# Altium PCB SL.PcbDoc (part 2 of 2)
Units mm, origin at the board's own origin, x right, y up, seen from the top; angles counter-clockwise.
Board outline 70 x 42.24 mm, 2 copper layers (Top Layer, Bottom Layer); 144 components, 106 nets, 459 pads, 155 vias.
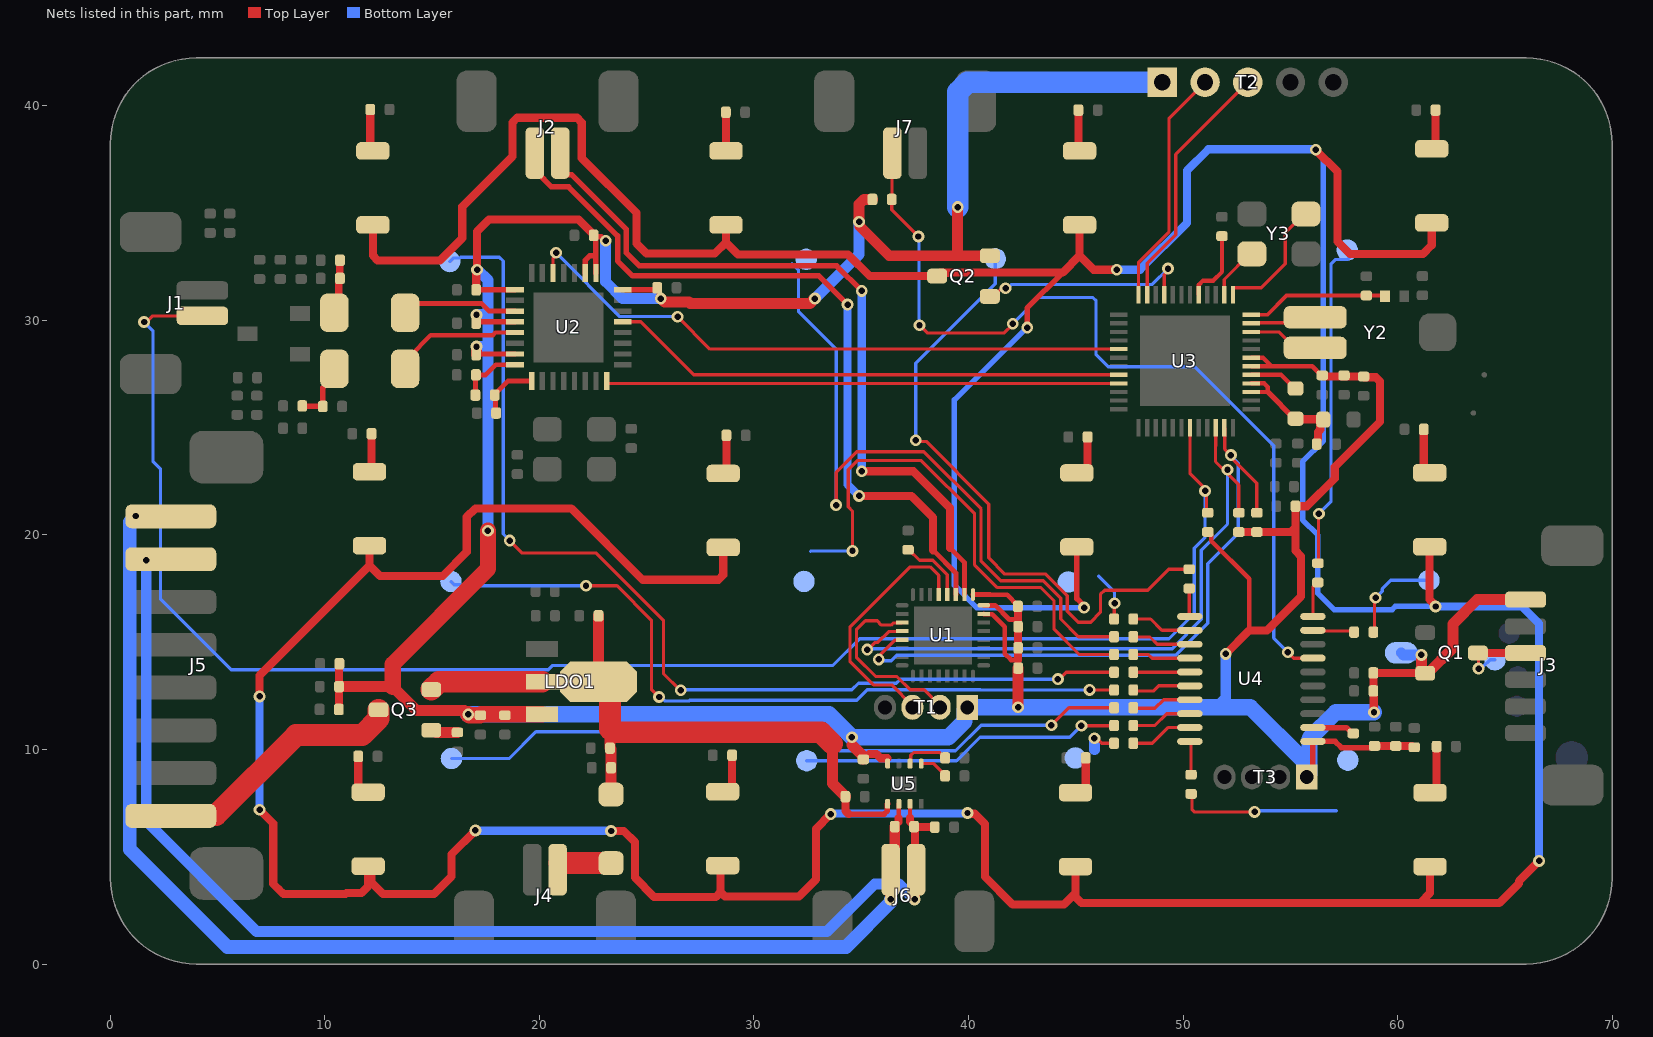
[diagram p2: the nets of this part, all layers, seen from the top]

## Via types
v1: diameter 0.55, hole 0.3, Top Layer to Bottom Layer, tented both sides, 155 vias

## Nets (pads, with @x,y where several pads share a name; then routed paths per layer and width w, separated by ;. In a path a pad name is that pad's centre, name@x,y a point inside that pad or via, vN(x,y) a via of type N, cw(c..) or ccw(c..) an arc to the next point about the centre after c; other vN are vias at no path point) (continued)
NetC14_2: C14.2 C15.2 L1.2 U3.3 U3.4 | length 6.3
  Top Layer w0.203: U3.3@53.18,26.663 53.953,26.663 53.953,26.896 53.786,27.063 U3.4@53.18,27.063 ; L1.2@55.202,25.415 L1.2@55.244,25.415
  Top Layer w0.254: 53.953,26.663 L1.2@55.202,25.415
  Top Layer w0.381: L1.2@55.244,25.415 55.262,25.397 56.519,25.397 C15.2@56.538,25.378 56.399,25.24 56.399,24.91 56.284,24.794 56.284,24.446 56.27,24.433 C14.2@56.27,24.158
NetC19_1: C19.1 R6.1 U2.16 | length 3
  Top Layer w0.229: R6.1@17.015,26.521 17.028,26.534 17.028,27.449 C19.1@17.041,27.461 17.498,27.461 17.972,27.935 U2.16@18.854,27.935
NetC21_1: C21.1 C24.1 L2.1 | length 2.9
  Top Layer w0.254: C21.1@8.948,26.013 8.96,26.001 9.89,26.001 C24.1@9.903,25.988 9.903,26.864 10.437,27.398 L2.1@10.437,27.741
NetC27_1: C27.1 C28.1 L3.1 | length 2.6
  Top Layer w0.356: L3.1@10.437,30.357 10.65,30.57 10.65,31.907 C28.1@10.7,31.957 C27.1@10.7,32.805
NetC32_2: C32.2 L4.1 U3.12 | length 6.6
  Top Layer w0.178: U3.12@53.18,30.263 53.93,30.263 54.826,31.16 59.367,31.16 L4.1@59.408,31.119
NetC33_2: C33.2 U3.17 | length 3.5
  Top Layer w0.203: U3.17@50.726,31.189 50.728,31.191 50.728,31.654 50.93,31.856 51.408,31.856 51.813,32.262 C33.2@51.813,33.929
NetC38_1: C38.1 C40.1 D1.2 ESD3.1 LDO1.2 Q3.2 R14.2 U5.1 | length 30.4
  Top Layer w0.254: 34.414,6.989 36.069,6.989 36.217,7.138 36.217,7.453 U5.1@36.231,7.466
  Top Layer w0.381: C38.1@34.262,7.802 34.262,7.141 34.414,6.989
  Top Layer w0.508: R14.2@22.754,16.234 22.754,13.167 LDO1.2@22.76,13.161 ; 23.289,10.951 C40.1@23.289,10.062 23.301,10.062 23.34,10.024 ESD3.1@23.34,9.148 D1.2@23.34,7.903 ; 33.652,10.265 33.652,8.411 C38.1@34.262,7.802
  Top Layer w1.016: Q3.2@14.958,12.795 15.324,13.161 LDO1.2@20.122,13.161 ; LDO1.2@22.76,13.161 22.847,13.161 23.289,12.719 23.289,10.951 23.441,10.799 33.119,10.799 33.652,10.265
NetC41_2: C41.2 U4.2 | length 2
  Top Layer w0.254: U4.2@56.054,11.023 57.62,11.023 57.895,10.748 C41.2@57.935,10.748
NetC42_1: C42.1 ESD4.1 J5.7 J6.1 U5.3 | length 56.8
  Top Layer w0.203: 37.275,6.82 U5.3@37.275,7.466
  Top Layer w0.381: 37.275,6.82 37.275,6.631 37.424,6.482 37.424,6.455 37.5,6.379 ESD4.1@38.427,6.379 ; C42.1@37.5,6.367 37.5,4.456 J6.1@37.557,4.398
  Top Layer w0.508: v1(37.488,3.009) 37.496,3.017 37.496,4.336 J6.1@37.557,4.398
  Bottom Layer w0.508: v1(1.674,18.825) 1.674,6.659 6.817,1.515 33.411,1.515 35.629,3.733 36.752,3.733 37.476,3.009 v1(37.488,3.009)
NetC42_2: C42.2 J5.8 J6.2 U5.2 | length 58.3
  Top Layer w0.203: 36.742,6.811 36.753,6.822 U5.2@36.753,7.466
  Top Layer w0.381: C42.2@36.742,6.622 36.742,6.811
  Top Layer w0.508: v1(36.37,3.009) 36.37,5.171 36.563,5.364 C42.2@36.563,6.405
  Bottom Layer w0.635: v1(1.191,20.883) 0.912,20.603 0.912,5.338 5.458,0.791 34.287,0.791 36.37,2.874 v1(36.37,3.009)
NetD1_1: D1.1 J4.1 | length 2.4
  Top Layer w1.016: J4.1@20.93,4.702 D1.1@23.34,4.702
NetJ1_1: J1.1 R1.1 U3.43 | length 76.9
  Top Layer w0.152: v1(1.572,29.925) 1.68,29.925 1.965,30.211 J1.1@4.29,30.211 ; U3.43@50.326,24.992 50.326,22.858 v1@51.08,22.105 ; v1(51.026,22.051) v1@51.089,22.051 ; R1.1@51.153,21.035 51.089,21.098 51.089,21.988 v1@51.153,22.051
  Bottom Layer w0.152: v1(1.572,29.925) 1.983,29.514 1.983,23.441 2.334,23.09 2.334,17.017 5.631,13.72 20.412,13.72 20.611,13.919 33.683,13.919 34.929,15.164 49.344,15.164 50.518,16.338 50.518,19.383 51.026,19.891 v1(51.026,22.051)
NetJ2_1: J2.1 U1.11 | length 35.7
  Top Layer w0.229: 38.351,19.285 39.408,18.228 U1.11@39.408,17.22
  Top Layer w0.254: J2.1@19.784,37.799 19.784,37.013 20.199,36.598 20.199,36.581 20.556,36.224 21.359,36.224 23.645,33.938 23.645,32.77 24.342,32.072 33.029,32.072 v1(34.363,30.738)
  Top Layer w0.381: v1(34.897,21.822) 37.335,21.822 38.351,20.806 38.351,19.285
  Bottom Layer w0.381: v1(34.363,30.738) 34.363,22.356 v1(34.897,21.822)
NetJ2_2: J2.2 U1.10 | length 35.3
  Top Layer w0.229: 39.138,19.389 39.215,19.312 39.808,18.719 U1.10@39.808,17.22
  Top Layer w0.254: J2.2@20.971,37.799 20.971,37.039 21.217,36.793 21.501,36.793 24.051,34.243 24.051,33.151 24.661,32.541 33.855,32.541 v1(35.024,31.373)
  Top Layer w0.381: v1(35.024,22.965) 37.437,22.965 39.138,21.265 39.138,19.389
  Bottom Layer w0.381: v1(35.024,22.965) v1(35.024,31.373)
NetJ3_3: J3.3 pad.1@64.539,14.177 Q1.3 | length 3.9
  Top Layer w0.152: Q1.3@63.743,14.498 63.777,14.464 v1(63.777,13.771)
  Top Layer w0.356: Q1.3@63.743,14.498 65.961,14.498 J3.3@65.963,14.496
  Bottom Layer w0.152: v1(63.777,13.771) 63.853,13.847 63.979,13.847 64.309,14.177 pad.1@64.539,14.177
NetJ5_1: J5.1 Q3.3 | length 12
  Top Layer w1.016: J5.1@2.819,6.902 2.866,6.949 4.936,6.949 8.659,10.672 11.731,10.672 12.504,11.445 Q3.3@12.504,11.848
NetL1_1: L1.1 U3.5 | length 2.3
  Top Layer w0.203: U3.5@53.18,27.463 54.564,27.463 55.202,26.826 L1.1@55.244,26.826
NetL2_2: L2.2 U2.13 | length 6
  Top Layer w0.203: L2.2@13.736,27.741 13.736,28.097 14.433,28.794 14.433,28.816 14.928,29.311 17.824,29.311 17.948,29.435 U2.13@18.854,29.435
NetL3_2: L3.2 U2.11 | length 5.4
  Top Layer w0.229: L3.2@13.736,30.357 14.176,30.797 17.29,30.797 17.652,30.435 U2.11@18.854,30.435
NetLED1_1: LED1.1 LED2.1 LED3.1 LED4.1 LED5.1 LED6.1 LED7.1 LED8.1 LED9.1 LED10.1 LED11.1 LED12.1 Q2.3 | length 262.4
  Top Layer w0.254: v1(42.738,29.666) 42.738,30.578 44.396,32.236 ; LED9.1@45.051,19.44 45.051,17.031 45.387,16.696 v1(45.387,16.615)
  Top Layer w0.381: v1(6.957,7.192) 7.592,6.557 7.592,3.738 7.846,3.483 8.065,3.264 10.965,3.264 11.007,3.306 11.707,3.306 12.014,3.613 LED10.1@12.014,4.561 12.172,4.404 12.172,3.806 12.713,3.264 15.088,3.264 15.904,4.08 15.904,5.116 v1(17.015,6.227) ; v1(6.957,12.475) 6.957,13.455 12.08,18.579 ; LED1.1@12.08,19.498 12.08,18.579 ; LED4.1@12.236,34.452 12.236,33.018 12.459,32.795 15.364,32.795 16.406,33.837 16.406,35.31 18.742,37.647 18.742,39.227 18.966,39.45 21.745,39.45 21.968,39.227 21.968,37.57 24.521,35.018 24.521,33.583 24.985,33.118 28.171,33.118 28.692,33.64 ; v1(23.34,6.201) 23.929,6.201 24.447,5.683 24.447,4.027 25.346,3.128 28.222,3.128 28.445,3.351 ; LED11.1@28.542,4.586 28.445,4.489 28.445,3.351 ; LED6.1@28.566,19.418 28.566,18.134 28.342,17.911 24.813,17.911 21.486,21.238 17.015,21.238 16.609,20.832 16.609,19.206 15.491,18.089 12.57,18.089 12.08,18.579 ; LED5.1@28.692,34.452 28.692,33.64 ; v1(33.576,6.989) 32.89,6.303 32.89,3.941 32.103,3.153 28.643,3.153 28.445,3.351 ; v1(39.951,7.04) 39.984,7.007 40.288,7.007 40.764,6.532 40.764,4.067 42.059,2.772 44.447,2.772 44.985,3.31 ; LED12.1@44.985,4.541 44.985,3.31 ; LED3.1@45.178,34.452 45.178,33.018 ; v1(46.911,32.363) 45.833,32.363 45.178,33.018 ; v1(56.182,37.951) 57.198,36.935 57.198,33.676 57.774,33.1 61.186,33.1 61.589,33.504 LED2.1@61.589,34.547 ; LED8.1@61.494,19.453 61.494,16.987 61.77,16.712 v1(61.77,16.666) ; LED7.1@61.513,4.542 61.513,3.303 61.059,2.849 ; v1(66.596,4.804) 65.653,3.861 65.653,3.76 64.742,2.849 61.059,2.849 ; 28.692,33.64 29.258,33.075 34.389,33.075 35.397,32.066 Q2.3@38.539,32.066 38.693,32.22 39.02,32.22 39.036,32.236 44.396,32.236 45.178,33.018 ; 44.985,3.31 44.985,3.123 45.26,2.849 61.059,2.849
  Bottom Layer w0.254: v1(42.738,29.666) 42.715,29.666 39.342,26.293 39.342,17.657 40.383,16.615 v1(45.387,16.615) ; v1(56.182,37.951) 56.182,37.879 56.538,37.523 56.538,24.388 55.572,23.423 55.572,20.705 56.284,19.994 56.284,17.276 57.046,16.514 59.741,16.514 59.894,16.666 v1(61.77,16.666)
  Bottom Layer w0.381: v1(6.957,7.192) v1(6.957,12.475) ; v1(17.015,6.227) 17.028,6.214 23.327,6.214 v1(23.34,6.201) ; v1(33.576,6.989) 33.601,7.014 39.926,7.014 v1(39.951,7.04) ; v1(46.911,32.363) 48.003,32.363 50.188,34.548 50.188,36.986 51.178,37.977 v1@56.182,37.977 ; v1(61.77,16.666) 65.809,16.666 66.596,15.879 v1(66.596,4.804)
NetLED1_2: LED1.2 R12.1 | length 1.8
  Top Layer w0.381: LED1.2@12.08,22.946 12.173,23.039 R12.1@12.173,24.718
NetLED2_2: LED2.2 R9.1 | length 1.9
  Top Layer w0.381: LED2.2@61.589,37.996 61.77,38.176 R9.1@61.77,39.806
NetLED3_2: LED3.2 R11.1 | length 1.9
  Top Layer w0.381: R11.1@45.123,39.806 45.123,37.955 LED3.2@45.178,37.901
NetLED4_2: LED4.2 R13.1 | length 2
  Top Layer w0.381: R13.1@12.113,39.831 12.113,38.023 LED4.2@12.236,37.901
NetLED5_2: LED5.2 R20.1 | length 1.8
  Top Layer w0.254: LED5.2@28.689,37.904 LED5.2@28.692,37.901
  Top Layer w0.381: LED5.2@28.689,37.904 R20.1@28.689,39.704
NetLED6_2: LED6.2 R24.1 | length 1.8
  Top Layer w0.381: LED6.2@28.566,22.866 28.715,23.015 R24.1@28.715,24.642
NetLED7_2: LED7.2 R28.1 | length 2.3
  Top Layer w0.381: LED7.2@61.513,7.991 61.605,7.991 61.821,8.207 R28.1@61.821,10.138
NetLED8_2: LED8.2 R32.1 | length 2.1
  Top Layer w0.381: R32.1@61.221,24.921 61.221,23.175 LED8.2@61.494,22.901
NetLED9_2: LED9.2 R36.1 | length 2
  Top Layer w0.381: LED9.2@45.051,22.888 45.333,22.888 45.549,23.104 R36.1@45.549,24.566
NetLED10_2: LED10.2 R41.1 | length 2
  Top Layer w0.381: R41.1@11.554,9.681 11.554,8.225 11.77,8.01 LED10.2@12.014,8.01
NetLED11_2: LED11.2 R42.1 | length 2
  Top Layer w0.254: LED11.2@28.542,8.034 28.704,8.034 LED11.2@28.979,8.308
  Top Layer w0.381: LED11.2@28.979,8.308 R42.1@28.979,9.732
NetLED12_2: LED12.2 R44.1 | length 1.9
  Top Layer w0.254: LED12.2@44.985,7.99 45.189,7.99 LED12.2@45.463,8.264
  Top Layer w0.381: LED12.2@45.463,8.264 R44.1@45.463,9.605
NetQ3_1: Q3.1 R17.2 | length 1.3
  Top Layer w0.508: Q3.1@14.958,10.9 15.078,10.9 15.18,10.799 R17.2@16.177,10.799
NetR3_1: R3.1 R6.2 U2.17 | length 2.9
  Top Layer w0.229: R3.1@17.98,25.683 17.947,25.716 17.947,26.488 R6.2@17.914,26.521 17.914,26.561 18.525,27.172 U2.17@19.634,27.172
NetR5_2: R5.2 U1.12 | length 3.2
  Top Layer w0.152: R5.2@37.183,19.308 37.222,19.308 37.715,18.815 38.336,18.815 39.008,18.143 U1.12@39.008,17.22
NetR18_1: R18.1 TP1.1 | length 7.6
  Top Layer w0.152: R18.1@50.373,7.928 50.42,7.881 50.42,7.188 50.518,7.09 v1(53.337,7.09)
  Bottom Layer w0.152: v1(53.337,7.09) 53.388,7.141 57.156,7.141
NetR18_2: R18.2 U4.20 | length 1.6
  Top Layer w0.152: U4.20@50.316,10.376 50.373,10.319 R18.2@50.373,8.827
NetR21_1: R21.1 TP2.1 | length 1.5
  Top Layer w0.152: v1(45.87,10.519) 45.977,10.519 46.206,10.291 R21.1@46.784,10.291
  Bottom Layer w0.508: 45.87,9.986 v1(45.87,10.519)
NetR21_2: R21.2 U4.19 | length 2.9
  Top Layer w0.152: R21.2@47.683,10.291 48.562,10.291 49.294,11.023 U4.19@50.316,11.023
NetR23_1: R23.1 TP3.1 | length 15
  Top Layer w0.152: v1(45.26,11.104) 45.267,11.111 46.777,11.111 R23.1@46.784,11.118
  Bottom Layer w0.152: TP3.1@32.458,9.478 39.443,9.478 40.536,10.57 44.727,10.57 v1(45.26,11.104)
NetR23_2: R23.2 U4.18 | length 2.9
  Top Layer w0.152: R23.2@47.683,11.118 48.678,11.118 49.23,11.67 U4.18@50.316,11.67
NetR26_1: R26.1 TP4.1 | length 32.6
  Top Layer w0.152: v1(43.863,11.129) 44.679,11.945 R26.1@46.784,11.945
  Bottom Layer w0.152: TP4.1@15.898,9.58 18.59,9.58 19.835,10.824 33.093,10.824 33.982,9.935 39.393,9.935 40.586,11.129 v1(43.863,11.129)
NetR26_2: R26.2 U4.17 | length 2.8
  Top Layer w0.152: R26.2@47.683,11.945 47.712,11.916 48.689,11.916 49.09,12.317 U4.17@50.316,12.317
NetR27_1: R27.1 TP5.1 | length 35.3
  Top Layer w0.152: v1(22.171,17.631) 23.619,17.631 25.219,16.031 25.219,12.802 v1@25.575,12.446 ; v1(45.641,12.776) 45.642,12.774 46.783,12.774 R27.1@46.784,12.773
  Bottom Layer w0.152: TP5.1@15.872,17.835 16.034,17.672 16.344,17.672 16.385,17.631 v1(22.171,17.631) ; v1(25.575,12.445) 25.673,12.445 25.863,12.255 26.955,12.255 26.997,12.297 34.795,12.297 35.277,12.78 40.543,12.78 40.547,12.776 v1(45.641,12.776)
NetR27_2: R27.2 U4.16 | length 2.7
  Top Layer w0.152: R27.2@47.683,12.773 47.726,12.729 48.638,12.729 48.873,12.964 U4.16@50.316,12.964
NetR30_1: R30.1 TP6.1 | length 48.7
  Top Layer w0.152: v1(18.615,19.74) 19.2,19.155 22.654,19.155 25.778,16.031 25.778,13.542 26.561,12.759 v1(26.591,12.759) ; v1(44.168,13.279) 44.238,13.279 44.559,13.6 R30.1@46.784,13.6
  Bottom Layer w0.152: TP6.1@15.821,32.744 15.984,32.907 16.293,32.907 16.334,32.948 18.133,32.948 18.311,32.77 18.311,20.044 v1(18.615,19.74) ; v1(26.591,12.759) 26.612,12.78 34.567,12.78 34.871,13.085 36.642,13.085 36.836,13.279 v1(44.168,13.279)
NetR30_2: R30.2 U4.15 | length 2.6
  Top Layer w0.152: R30.2@47.683,13.6 47.688,13.606 50.31,13.606 U4.15@50.316,13.612
NetR31_1: R31.1 TP7.1 | length 24.3
  Top Layer w0.152: v1(34.592,19.257) 34.592,21.106 34.393,21.305 34.393,23.047 34.815,23.469 37.805,23.469 40.282,20.993 40.282,18.597 41.323,17.555 43.356,17.555 43.99,16.921 43.99,15.599 45.162,14.427 R31.1@46.784,14.427
  Bottom Layer w0.152: 32.636,19.232 32.662,19.257 v1(34.592,19.257)
NetR31_2: R31.2 U4.14 | length 2.7
  Top Layer w0.152: R31.2@47.683,14.427 48.388,14.427 48.557,14.259 U4.14@50.316,14.259
NetR33_1: R33.1 TP9.1 | length 32.5
  Top Layer w0.152: v1(33.83,21.391) 33.83,22.915 34.795,23.88 37.92,23.88 40.586,21.214 40.586,18.774 41.501,17.86 43.482,17.86 44.295,17.047 44.295,16.082 45.122,15.255 R33.1@46.784,15.255
  Bottom Layer w0.152: 31.773,32.643 32.077,32.338 32.077,30.408 33.83,28.655 v1(33.83,21.391)
NetR33_2: R33.2 U4.13 | length 2.8
  Top Layer w0.152: R33.2@47.683,15.255 47.694,15.244 48.46,15.244 48.798,14.906 U4.13@50.316,14.906
NetR34_1: R34.1 TP8.1 | length 4.5
  Top Layer w0.152: R34.1@58.87,15.472 58.923,15.525 58.923,17.015 v1(58.976,17.068)
  Bottom Layer w0.152: v1(58.976,17.068) 58.976,17.072 59.282,17.377 59.282,17.485 59.682,17.885 TP8.1@61.465,17.885
NetR34_2: R34.2 U4.9 | length 2
  Top Layer w0.152: U4.9@56.054,15.553 56.085,15.521 57.923,15.521 R34.2@57.972,15.472
NetR35_1: R35.1 TP11.1 | length 2.3
  Top Layer w0.152: R35.1@46.784,16.082 46.797,16.095 46.797,16.806 v1(46.809,16.819)
  Bottom Layer w0.152: 46.065,18.071 46.809,17.327 v1(46.809,16.819)
NetR35_2: R35.2 U4.12 | length 2.9
  Top Layer w0.152: R35.2@47.683,16.082 48.486,16.082 49.015,15.553 U4.12@50.316,15.553
NetR37_2: R37.2 U5.6 | length 2.2
  Top Layer w0.152: U5.6@37.275,9.342 37.312,9.379 37.312,9.734 37.437,9.859 38.656,9.859 38.742,9.773 38.761,9.773 38.91,9.624 R37.2@38.91,9.605
NetR38_1: R38.1 TP10.1 | length 15.2
  Top Layer w0.152: R38.1@56.284,18.683 56.309,18.708 56.309,20.959 v1(56.334,20.984)
  Bottom Layer w0.152: v1(56.334,20.984) 56.893,21.543 56.893,32.617 57.117,32.842 57.676,32.842 TP10.1@57.757,32.922
NetR38_2: R38.2 U4.10 | length 1.7
  Top Layer w0.152: U4.10@56.054,16.2 56.054,17.573 56.265,17.784 R38.2@56.284,17.784
NetR39_1: R39.1 TP12.1 | length 29.7
  Top Layer w0.152: v1(37.541,24.411) 37.592,24.36 38.024,24.36 40.942,21.441 40.942,18.927 41.691,18.178 43.595,18.178 44.345,17.428 44.6,17.173 44.6,16.438 45.108,15.93 45.692,15.93 46.149,16.387 46.149,17.225 46.352,17.428 48.359,17.428 49.334,18.403 R39.1@50.289,18.403
  Bottom Layer w0.152: v1(37.541,24.411) 37.541,27.997 41.247,31.703 TP12.1@41.247,32.871
NetR39_2: R39.2 U4.11 | length 1.3
  Top Layer w0.152: R39.2@50.289,17.504 50.289,16.227 U4.11@50.316,16.2
NetR40_2: R40.2 U5.5 | length 1.4
  Top Layer w0.152: U5.5@37.797,9.342 38.374,9.342 38.91,8.806 R40.2@38.91,8.767
NetU3_10: U3.10 Y2.2 | length 3.3
  Top Layer w0.152: U3.10@53.18,29.463 54.47,29.463 55.214,28.719 Y2.2@56.161,28.719
NetU3_11: U3.11 Y2.1 | length 3.1
  Top Layer w0.152: U3.11@53.18,29.863 53.204,29.887 55.901,29.887 Y2.1@56.161,30.147
NetU3_13: U3.13 Y3.4 | length 6
  Top Layer w0.152: U3.13@52.326,31.189 52.326,31.494 52.35,31.517 52.431,31.517 52.439,31.525 53.642,31.525 54.76,32.643 54.76,34.082 55.637,34.959 Y3.4@55.731,34.959
NetU3_14: U3.14 Y3.2 | length 2.5
  Top Layer w0.152: U3.14@51.926,31.189 51.926,31.908 53.118,33.1 Y3.2@53.21,33.1
NPD: U2.6 U3.29 | length 29.1
  Top Layer w0.152: U2.6@20.634,32.206 20.634,32.903 20.774,33.043 v1(20.774,33.151) ; v1(26.439,30.17) 27.945,28.663 U3.29@47,28.663
  Bottom Layer w0.152: v1(20.774,33.151) 23.746,30.179 26.429,30.179 v1(26.439,30.17)
NSS: U2.24 U3.33 | length 23.9
  Top Layer w0.152: U2.24@23.134,27.172 23.134,27.112 23.183,27.063 U3.33@47,27.063
P1.4: J7.1 R43.1 U4.7 | length 41.5
  Top Layer w0.152: J7.1@36.453,37.799 36.437,37.783 36.437,35.656 R43.1@36.421,35.64 36.421,35.157 v1(37.665,33.913) ; v1(37.716,29.773) 38.073,29.417 41.671,29.417 42.06,29.805 v1(42.06,29.849) ; v1(54.887,14.533) 55.161,14.259 U4.7@56.054,14.259
  Bottom Layer w0.152: v1(37.665,33.913) 37.691,33.887 37.691,29.798 v1(37.716,29.773) ; v1(42.06,29.849) 43.279,31.068 45.793,31.068 45.946,30.916 45.946,28.401 46.505,27.842 50.543,27.842 54.226,24.159 54.226,15.193 v1(54.887,14.533)
SCK: U2.29 U3.32 | length 24.1
  Top Layer w0.152: U2.29@23.884,29.935 24.726,29.935 27.198,27.463 U3.32@47,27.463
"SCL GPIO31": R46.1 U1.21 U3.47 | length 30.8
  Top Layer w0.152: v1(35.813,14.198) 35.889,14.274 35.889,14.424 36.561,15.096 36.885,15.096 U1.21@36.908,15.12 ; U3.47@51.926,24.992 51.95,24.969 51.95,24.003 52.245,23.708 52.245,23.6 53.439,22.407 R46.1@53.439,21.035
  Bottom Layer w0.152: v1(35.813,14.198) 35.873,14.137 36.401,14.137 36.656,14.392 49.666,14.392 51.157,15.883 51.157,18.657 52.576,20.076 52.576,23.35 52.233,23.693 v1(52.233,23.72)
"SDA GPIO30": R45.1 U1.20 U3.46 | length 30.2
  Top Layer w0.152: v1(35.28,14.654) 35.323,14.654 35.657,14.989 35.765,14.989 36.273,15.496 36.885,15.496 U1.20@36.908,15.52 ; U3.46@51.526,24.992 51.526,24.149 51.513,24.136 51.513,23.42 v1@51.984,22.948 ; v1(52.072,23.036) v1@51.984,22.948 ; R45.1@52.601,21.035 52.601,22.332 v1@51.984,22.948
  Bottom Layer w0.152: v1(35.28,14.654) 35.326,14.701 49.493,14.701 50.852,16.061 50.852,19.287 52.072,20.506 v1(52.072,23.036)
SWDIO: Q2.1 U3.21 | length 10.1
  Top Layer w0.152: Q2.1@40.993,31.119 41.165,31.119 41.47,31.424 41.653,31.424 v1(41.729,31.5) ; U3.21@49.126,31.189 49.126,32.134 49.299,32.307 v1(49.299,32.414)
  Bottom Layer w0.152: v1(41.729,31.5) 41.837,31.5 42.015,31.678 48.562,31.678 v1(49.299,32.414)
"UART RX": T2.2 U3.24 | length 11.2
  Top Layer w0.152: U3.24@47.926,31.189 47.926,32.718 49.349,34.141 49.349,39.425 T2.2@51.026,41.101
"UART TX": T2.3 U3.23 | length 11.9
  Top Layer w0.152: U3.23@48.326,31.189 48.326,32.661 49.654,33.989 49.654,37.737 T2.3@53.018,41.101
VBAT: C1.1 C2.1 C4.2 C7.1 C8.1 C16.1 C17.1 C18.1 C20.1 C22.2 C23.2 C34.2 C35.2 C36.1 C37.1 C43.1 ESD1.2 ESD2.2 J3.1 LDO1.3 pad.1@60.17,14.507 Q1.2 Q2.2 R1.2 R2.1 R15.1 R19.1 R22.1 R25.1 R29.1 R43.2 R45.2 R46.2 T1.1 T2.1 T3.1 U1.7 U1.8 U1.9 U2.2 U2.3 U2.9 U2.12 U2.15 U2.32 U3.6 U3.7 U4.1 U5.8 | length 211.8
  Top Layer w0.203: U5.8@36.231,9.342 36.231,9.592 ; R1.2@51.153,20.136 51.186,20.136 51.311,20.011 51.311,19.724 53.082,17.953 53.082,15.547 ; U3.6@53.18,27.863 54.125,27.863 ; U3.7@53.18,28.263 53.181,28.262 53.726,28.262 54.125,27.863 ; C23.2@56.487,27.436 56.447,27.436 56.02,27.863 54.125,27.863
  Top Layer w0.229: U1.9@40.209,17.22 41.006,17.22 41.014,17.212 41.797,17.212 42.304,16.706 C4.2@42.304,16.666 ; U1.7@40.708,16.32 40.723,16.306 41.1,16.306 41.691,15.714 41.691,14.469 41.983,14.177 42.309,14.177 ; U1.8@40.709,16.72 41.243,16.72 41.907,16.057 42.309,16.057
  Top Layer w0.254: C17.1@17.05,31.424 17.06,31.433 18.852,31.433 U2.9@18.854,31.435 ; v1@17.05,32.322 v1(17.091,32.363) ; C18.1@17.109,29.933 18.852,29.933 U2.12@18.854,29.935 ; C16.1@17.198,28.435 U2.15@18.854,28.435 ; U2.3@22.134,32.206 22.136,32.208 22.136,32.811 22.337,33.012 22.634,33.012 ; C2.1@22.426,34.104 22.527,34.003 C2.1@22.527,33.964 22.595,33.896 22.882,33.896 23.066,33.711 v1(23.087,33.711) ; U2.2@22.634,32.206 22.634,33.012 ; C2.1@22.634,33.817 22.634,33.012 ; U2.32@23.884,31.435 23.886,31.437 C1.1@25.489,31.437 ; C1.1@25.489,31.525 25.59,31.424 25.59,31.078 v1(25.651,31.017) ; T3.1@55.765,8.716 56.054,9.005 U4.1@56.054,10.376 57.087,10.376 57.376,10.088 58.849,10.088 C37.1@58.925,10.164
  Top Layer w0.381: R15.1@10.649,11.866 10.662,11.878 10.662,13.984 R22.1@10.675,13.997 ; C17.1@17.05,31.424 v1@17.05,32.322 ; v1(17.091,32.363) 17.091,34.141 17.65,34.7 21.83,34.7 C2.1@22.426,34.104 ; 35.369,9.783 35.711,9.783 35.901,9.592 36.231,9.592 ; C4.2@42.304,16.666 42.309,16.661 42.309,16.057 42.309,14.177 ; v1(51.991,14.456) 53.082,15.547 53.92,15.547 55.504,17.132 55.504,19.005 55.242,19.267 55.242,20.359 ; R45.2@52.601,20.136 R46.2@53.439,20.136 55.019,20.136 55.242,20.359 ; C23.2@56.487,27.436 56.526,27.436 56.577,27.385 ESD1.2@58.417,27.385 58.455,27.347 58.994,27.347 59.179,27.162 59.179,25.277 57.071,23.169 57.071,22.635 55.776,21.34 R2.1@55.242,21.34 55.242,20.359 ; v1(58.9,11.739) 58.885,11.753 58.885,12.714 R25.1@58.87,12.729 R29.1@58.87,13.567 58.878,13.56 Q1.2@61.2,13.56 ; C37.1@58.925,10.164 C36.1@59.916,10.164 60.679,10.164 60.74,10.103 ESD2.2@60.779,10.103 ; Q1.2@61.28,13.56 Q1.2@61.287,13.553
  Top Layer w0.508: R19.1@10.685,12.931 13.155,12.931 14.272,11.815 16.496,11.815 16.674,11.637 v1(16.685,11.637) ; C16.1@17.058,28.409 17.058,28.774 v1(17.066,28.782) ; v1(25.651,31.017) 25.663,31.017 25.829,30.851 26.97,30.851 27.028,30.793 32.604,30.793 32.828,31.017 v1(32.839,31.017) ; 34.575,10.209 35.086,9.698 C43.1@35.086,9.564 ; R43.2@35.522,35.64 35.12,35.64 34.897,35.417 v1(34.897,34.599) 34.929,34.566 34.929,34.389 36.304,33.013 39.494,33.013 ; v1(39.494,35.284) 39.494,33.013 ; Q2.2@40.993,33.013 39.494,33.013 ; v1(42.314,11.967) C20.1@42.314,13.796 ; v1(61.11,14.406) 61.118,14.398 61.118,13.643 61.2,13.56 Q1.2@61.28,13.56 ; Q1.2@61.287,13.553 61.408,13.553 62.583,14.728 62.583,15.853 63.714,16.985 J3.1@65.963,16.985
  Top Layer w0.762: 13.155,12.931 13.155,13.975 17.599,18.419 v1(17.599,20.197) ; v1(16.685,11.637) 16.724,11.598 C35.2@17.249,11.598 17.293,11.642 LDO1.3@20.122,11.642
  Bottom Layer w0.508: v1(17.066,28.782) 17.074,28.79 17.557,28.79 17.599,28.833 ; v1(17.066,30.255) 17.098,30.288 17.581,30.288 17.599,30.306 ; v1@17.142,32.338 17.599,31.881 17.599,30.306 ; v1(17.599,20.197) 17.599,28.833 ; v1(23.087,33.711) 23.087,31.803 23.873,31.017 v1(25.651,31.017) ; v1(32.839,31.017) 34.897,33.075 v1(34.897,34.599) ; 51.559,11.967 51.991,12.399 v1(51.991,14.456) ; pad.1@60.17,14.507 60.267,14.41 61.105,14.41 v1(61.11,14.406) ; 17.599,28.833 17.599,30.306
  Bottom Layer w0.762: v1(16.685,11.637) 33.5,11.637 v1(34.567,10.57) 39.062,10.57 39.814,11.322 39.814,11.841 T1.1@39.941,11.967 51.559,11.967 53.134,11.967 55.638,9.463 ; T3.1@55.891,8.843 55.891,10.508 57.122,11.739 v1(58.9,11.739)
  Bottom Layer w1.016: v1(39.494,35.284) 39.494,40.644 39.951,41.101 T2.1@49.034,41.101
WTV380P_RX: T1.2 U1.19 | length 8.6
  Top Layer w0.152: U1.19@36.908,15.92 36.885,15.896 36.484,15.896 36.389,15.801 36.191,15.801 35.941,15.801 35.74,16.001 35.197,16.001 34.776,15.58 34.776,14.298 35.671,13.402 36.662,13.402 37.284,12.78 37.927,12.78 38.663,12.043 T1.2@38.663,11.967
WTV380P_TX: T1.3 U1.13 | length 11.8
  Top Layer w0.152: T1.3@37.386,11.967 37.386,12.043 36.421,13.009 35.57,13.009 34.471,14.108 34.471,15.706 37.275,18.51 38.21,18.51 38.608,18.112 U1.13@38.608,17.22
pads on no net: A1.2 U1.1 U1.2 U1.3 U1.5 U1.6 U1.14 U1.15 U1.18 U1.22 U1.23 U1.24 U1.25 U1.26 U1.27 U1.28 U1.29 U1.30 U1.31 U1.32 U2.7 U2.8 U2.19 U2.20 U2.25 U2.26 U2.27 U2.28 U3.8 U3.9 U3.15 U3.16 U4.8

## Polygon pours and split planes (outlines as drawn)
NetR23_1 on Bottom Layer "NETR23_1_L02_P009" (solid, pour order 9): 24.098,2.265 33.098,2.265 33.098,10.265 24.098,10.265
NetR34_1 on Bottom Layer "NETR34_1_L02_P013" (solid, pour order 13): 57.223,17.175 66.016,17.175 66.016,21.894 62.735,25.175 57.223,25.175
GND on Bottom Layer "NONET_L01_P-001" (solid, remove dead copper, pour order 29): 66.571,25.556 70.304,25.556 70.304,0.893 68.45,-0.961 68.399,-0.911 50.111,-0.911 50.111,4.982 56.284,4.982 56.284,1.934 65.885,1.934 65.885,2.29 66.672,3.077
NetR35_1 on Bottom Layer "NETR35_1_L02_P007" (solid, pour order 7): 40.557,17.175 49.557,17.175 49.557,24.642 40.557,24.642
GND on Bottom Layer "NONET_L01_P-001" (solid, remove dead copper, pour order 27): 19.733,31.322 19.733,31.347 18.869,31.347 18.869,21.746 23.48,21.746 23.48,31.41
GND on Bottom Layer "NONET_L01_P-001" (solid, pour order 18): 47.546,30.331 47.597,30.382 50.873,30.382 52.118,31.627 52.093,31.652 52.093,36.554 52.118,36.529 56.131,36.529 56.131,33.405 56.131,32.846 55.776,31.881 55.776,26.979 55.852,26.902 56.131,26.902 56.131,25.353 54.506,25.353 51.331,28.528 51.331,28.63 47.724,28.63 47.597,28.757
GND on Bottom Layer "NONET_L01_P-001" (solid, pour order 15): 57.858,32.49 62.151,32.49 62.837,31.805 62.837,27.842 57.858,27.842
NetR39_1 on Bottom Layer "NONET_L01_P-001" (solid, pour order 20): 40.557,40.136 40.582,40.11 49.4,40.11 49.4,35.767 45.743,32.109 45.716,32.136 40.557,32.136
NetR18_1 on Bottom Layer "NETR18_1_L02_P005" (solid, pour order 5): 57.016,2.265 66.016,2.265 66.016,10.265 57.016,10.265
NetR38_1 on Bottom Layer "NETR38_1_L02_P012" (solid, pour order 12): 57.016,40.136 66.016,40.136 66.016,36.533 62.151,32.668 57.016,32.668
NetR27_1 on Bottom Layer "NETR27_1_L02_P011" (solid, pour order 11): 7.562,17.175 16.562,17.175 16.562,25.175 7.562,25.175
NetR26_1 on Bottom Layer "NETR26_1_L02_P010" (solid, pour order 10): 7.562,2.265 16.562,2.265 16.562,10.265 7.562,10.265
NetR31_1 on Bottom Layer "NETR31_1_L02_P008" (solid, pour order 8): 24.098,17.175 33.098,17.175 33.098,25.175 24.098,25.175
NetR21_1 on Bottom Layer "NETR21_1_L02_P006" (solid, pour order 6): 40.557,2.265 49.557,2.265 49.557,10.265 40.557,10.265
NetR33_1 on Bottom Layer "NETR33_1_L02_P001" (solid, pour order 1): 24.098,32.136 33.098,32.136 33.098,40.136 24.098,40.136
NetR30_1 on Bottom Layer "NETR30_1_L02_P000" (solid, pour order 0): 7.562,32.136 16.562,32.136 16.562,40.136 7.562,40.136
GND on Top Layer "NONET_L01_P-001" (solid, pour order 28): 20.851,14.355 20.825,14.329 19.403,14.329 19.403,15.752 19.606,15.955 19.606,17.708 20.012,17.708 20.089,17.631 20.089,15.752 20.546,15.295 20.876,15.295
GND on Top Layer "NONET_L01_P-001" (solid, pour order 26): 20.012,27.639 20.012,25.658 18.666,25.658 18.666,23.524 19.454,23.524 19.454,24.312 21.13,24.312 21.13,25.632 20.241,25.632 20.241,27.639
GND on Top Layer "NONET_L01_P-001" (solid, pour order 25): 24.584,24.21 24.584,23.651 24.127,23.651 24.127,22.026 22.044,22.026 22.044,23.829 23.594,23.829 23.594,24.261
GND on Top Layer "NONET_L01_P-001" (solid, pour order 22): 19.225,4.218 19.225,9.376 15.974,9.376 15.796,9.554 15.796,10.164 16.38,10.164 17.142,10.926 20.673,10.926 21.333,10.265 21.384,10.316 22.603,10.316 22.603,9.808 22.578,9.834 21.384,9.834 21.384,7.421 21.435,7.37 20.089,6.023 20.089,4.195
GND on Top Layer "NONET_L01_P-001" (solid, pour order 21): 34.795,8.894 34.795,7.446 35.456,7.446 35.532,7.522 35.532,7.954 37.564,7.954 37.64,7.878 37.64,7.243 38.021,7.243 38.021,8.894
GND on Top Layer "NONET_L01_P-001" (solid, remove dead copper, pour order 16): 66.621,18.724 66.621,25.556 69.873,25.556 69.923,25.607 70.025,25.505 70.025,-0.86 1.089,-0.86 -2.06,2.29 -1.654,2.696 -1.654,43.844 46.693,43.844 46.693,39.892 46.276,39.475 45.768,39.475 45.768,40.136 45.565,40.339 30.02,40.339 29.918,40.237 29.918,39.399 29.258,39.399 29.233,39.374 29.156,39.45 29.156,40.288 13.481,40.288 13.408,40.216 13.408,39.45 12.646,39.45 12.596,39.501 12.596,40.314 3.629,40.314 1.242,37.926 1.242,25.048 1.496,24.794 1.521,24.82 5.28,24.82 5.28,22.407 5.23,22.356 0.683,22.356 0.683,17.479 0.708,17.454 2.537,17.454 2.537,16.336 0.734,16.336 0.734,9.427 0.785,9.376 0.81,9.402 2.791,9.402 2.791,8.386 2.817,8.36 0.785,8.36 0.785,4.906 3.172,2.518 3.655,2.518 3.655,4.144 3.756,4.246 7.109,4.246 7.109,2.442 7.744,1.807 7.922,1.985 19.124,1.985 19.174,1.934 19.225,1.985 19.225,4.5 20.038,4.5 20.063,4.525 20.063,1.96 33.629,1.96 33.654,1.985 65.834,1.985 68.143,4.294 68.143,9.988 67.739,10.392 66.037,10.392 66.037,11.129 66.164,11.256 67.815,11.256 68.171,11.612 68.171,18.749
GND on Top Layer "NONET_L01_P-001" (solid, pour order 17): 51.61,34.573 52.448,34.573 52.448,34.497 52.626,34.319 52.651,34.345 53.871,34.345 53.871,35.843 53.845,35.869 53.896,35.919 56.461,35.919 56.461,33.811 56.411,33.76 54.963,33.76 54.963,31.957 55.039,31.881 62.761,31.881 62.1,32.541 56.741,32.541 56.741,36.427 56.639,36.529 51.305,36.529 51.305,34.649 51.356,34.599
GND on Top Layer "NONET_L01_P-001" (solid, pour order 19): 58.265,25.048 58.265,26.191 58.697,26.191 58.773,26.267 58.747,26.293 58.747,26.801 55.928,26.801 55.623,26.496 55.623,26.039 55.903,25.759 57.503,25.759 57.503,25.074 57.554,25.023
GND on Top Layer "NONET_L01_P-001" (solid, pour order 14): 58.087,30.331 58.138,30.382 62.811,30.382 62.811,26.85 63.853,25.809 63.853,25.226 62.049,25.226 61.541,25.734 60.729,25.734 60.729,24.54 60.678,24.489 60.652,24.515 59.89,24.515 59.89,27.918 59.484,28.325 57.985,28.325

## Keep-outs
Keep-Out Layer:
  lines w0.127: 0,4 ccw(c4,4) 4,0 ; 0,4 ccw(c4,4) 4,0 ; 0,4 0,38.237 ; 0,4 0,38.237 ; 0,38.237 cw(c4,38.237) 4,42.237 ; 0,38.237 cw(c4,38.237) 4,42.237 ; 4,0 66,0 ; 4,0 66,0 ; 4,42.237 66,42.237 ; 4,42.237 66,42.237 ; 66,0 ccw(c66,4) 70,4 ; 66,0 ccw(c66,4) 70,4 ; 66,42.237 cw(c66,38.237) 70,38.237 ; 66,42.237 cw(c66,38.237) 70,38.237 ; 70,4 70,38.237 ; 70,4 70,38.237
  lines w0.15: -1.421,0 4,0 ; 0,-0.761 0,4

## Other copper
Bottom Layer:
  pour cut-out: 15.733,21.175 16.562,21.175 16.562,21.023 15.733,21.023
  pour cut-out: 32.268,21.175 33.098,21.175 33.098,21.023 32.268,21.023
  pour cut-out: 15.733,6.265 16.562,6.265 16.562,6.113 15.733,6.113
  pour cut-out: 32.268,6.265 33.098,6.265 33.098,6.113 32.268,6.113
  pour cut-out: 65.187,6.265 66.016,6.265 66.016,6.113 65.187,6.113
  pour cut-out: 48.727,6.265 49.557,6.265 49.557,6.113 48.727,6.113
  pour cut-out: 48.727,21.175 49.557,21.175 49.557,21.023 48.727,21.023
  pour cut-out: 32.268,36.136 33.098,36.136 33.098,35.983 32.268,35.983
  pour cut-out: 15.733,36.351 16.562,36.351 16.562,36.199 15.733,36.199

## Silkscreen, mask and mechanical layers (free items; w line width, h text height)
Top Overlay:
  circle w0.013: c61.513,6.257 r1.182
  circle w0.013: c28.566,21.132 r1.182
  circle w0.013: c45.051,21.155 r1.182
  circle w0.013: c61.494,21.168 r1.182
  circle w0.013: c61.59,36.262 r1.182
  circle w0.013: c45.178,36.167 r1.182
  circle w0.013: c28.692,36.167 r1.182
  circle w0.013: c12.249,36.167 r1.182
  circle w0.013: c28.542,6.3 r1.182
  circle w0.013: c12.014,6.276 r1.182
  circle w0.013: c12.08,21.212 r1.182
  circle w0.013: c44.985,6.256 r1.182
  text "复位" at 0.99,37.975 h2.54
  text "调试" at 50.775,37.469 h3.05
  text "喇叭" at 17.551,34.895 h2.54
  text "防拆" at 33.705,33.327 h2.54
  text "指纹" at 67.324,6.707 h2.54 r270
  text "USB" at 17.498,5.947 h3.05
  text "电源输入" at 6.959,0.924 h2.54
  text "电机" at 42.011,0.931 h2.54
  text "+" at 25.118,0.546 h4.57
Bottom Overlay:
  pour cut-out: 20.337,8.411 16.883,8.411 16.883,5.16 20.337,5.16
  pour cut-out: 20.337,22.991 16.883,22.991 16.883,19.74 20.337,19.74
  pour cut-out: 20.337,38.256 16.883,38.256 16.883,35.005 20.337,35.005
  pour cut-out: 36.37,38.256 32.916,38.256 32.916,35.005 36.37,35.005
  pour cut-out: 36.37,22.991 32.916,22.991 32.916,19.74 36.37,19.74
  pour cut-out: 36.37,8.411 32.916,8.411 32.916,5.16 36.37,5.16
  pour cut-out: 53.205,8.411 49.751,8.411 49.751,5.16 53.205,5.16
  pour cut-out: 53.205,22.991 49.751,22.991 49.751,19.74 53.205,19.74
  pour cut-out: 53.205,38.256 49.751,38.256 49.751,35.005 53.205,35.005
  pour cut-out: 69.105,38.256 65.651,38.256 65.651,35.005 69.105,35.005
  pour cut-out: 69.105,22.991 65.651,22.991 65.651,19.74 69.105,19.74
  pour cut-out: 69.105,8.411 65.651,8.411 65.651,5.16 69.105,5.16
  text "9" at 33.496,35.876 h5.08 r270
  text "6" at 50.331,35.88 h5.08 r270
  text "3" at 66.232,35.873 h5.08 r270
  text "#" at 17.464,35.852 h5.08 r270
  text "0" at 17.464,20.632 h5.08 r270
  text "8" at 33.496,20.632 h5.08 r270
  text "5" at 50.374,20.593 h5.08 r270
  text "2" at 66.232,20.59 h5.08 r270
  text "*" at 17.466,6.793 h5.08 r270
  text "1" at 66.232,6.684 h5.08 r270
  text "7" at 33.539,6.067 h5.08 r270
  text "4" at 50.331,5.904 h5.08 r270

## Text inside footprints (layer, text, board x,y; h text height)
J3: Top Overlay "-" at 64.827,9.819 h1.52 r90; Top Overlay "+" at 63.579,16.054 h1.52
J5: Top Overlay "+" at 1.483,4.943 h1.52 r90
LED1: Top Overlay "+" at 13.05,18.43 h1.52
LED2: Top Overlay "+" at 62.559,33.479 h1.52
LED3: Top Overlay "+" at 46.148,33.384 h1.52
LED4: Top Overlay "+" at 13.205,33.384 h1.52
LED5: Top Overlay "+" at 29.662,33.384 h1.52
LED6: Top Overlay "+" at 29.535,18.35 h1.52
LED7: Top Overlay "+" at 62.482,3.475 h1.52
LED8: Top Overlay "+" at 62.464,18.385 h1.52
LED9: Top Overlay "+" at 46.021,18.372 h1.52
LED10: Top Overlay "+" at 12.984,3.493 h1.52
LED11: Top Overlay "+" at 29.511,3.518 h1.52
LED12: Top Overlay "+" at 45.955,3.474 h1.52
T1: Top Overlay "+" at 39.506,9.898 h1.42; Top Overlay "-" at 35.569,9.932 h1.42
T2: Top Overlay "+" at 48.599,38.778 h1.42; Top Overlay "-" at 56.727,38.685 h1.42
T3: Top Overlay "+" at 55.33,6.647 h1.42; Top Overlay "-" at 51.393,6.681 h1.42